# EAGLE board XBee-Explorer-Dongle-Panel-v23 (EAGLE 7.2.0), part 1 of 4
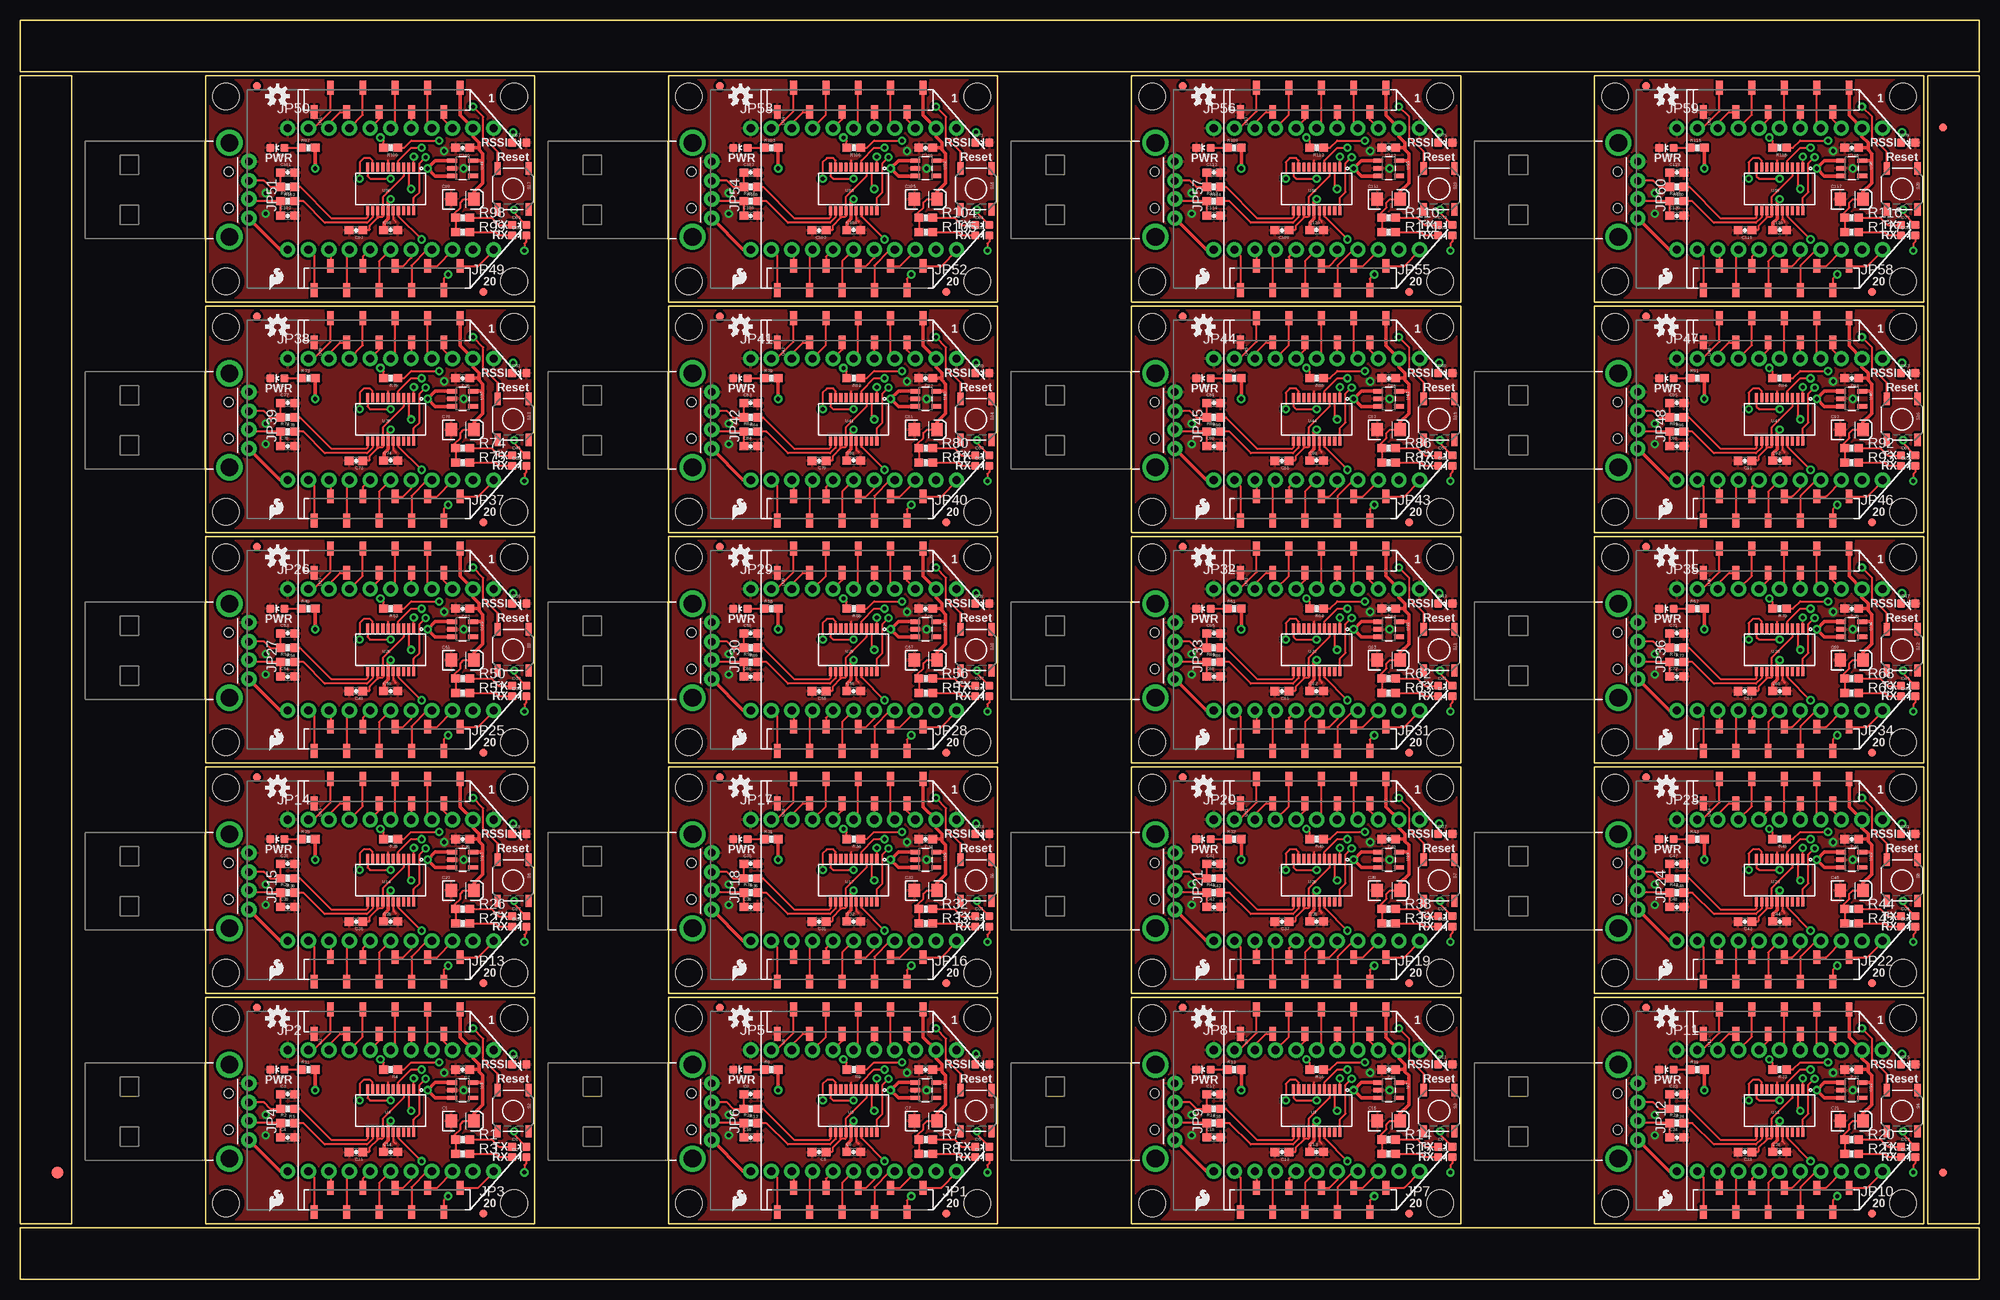
[diagram p0: board, top side]
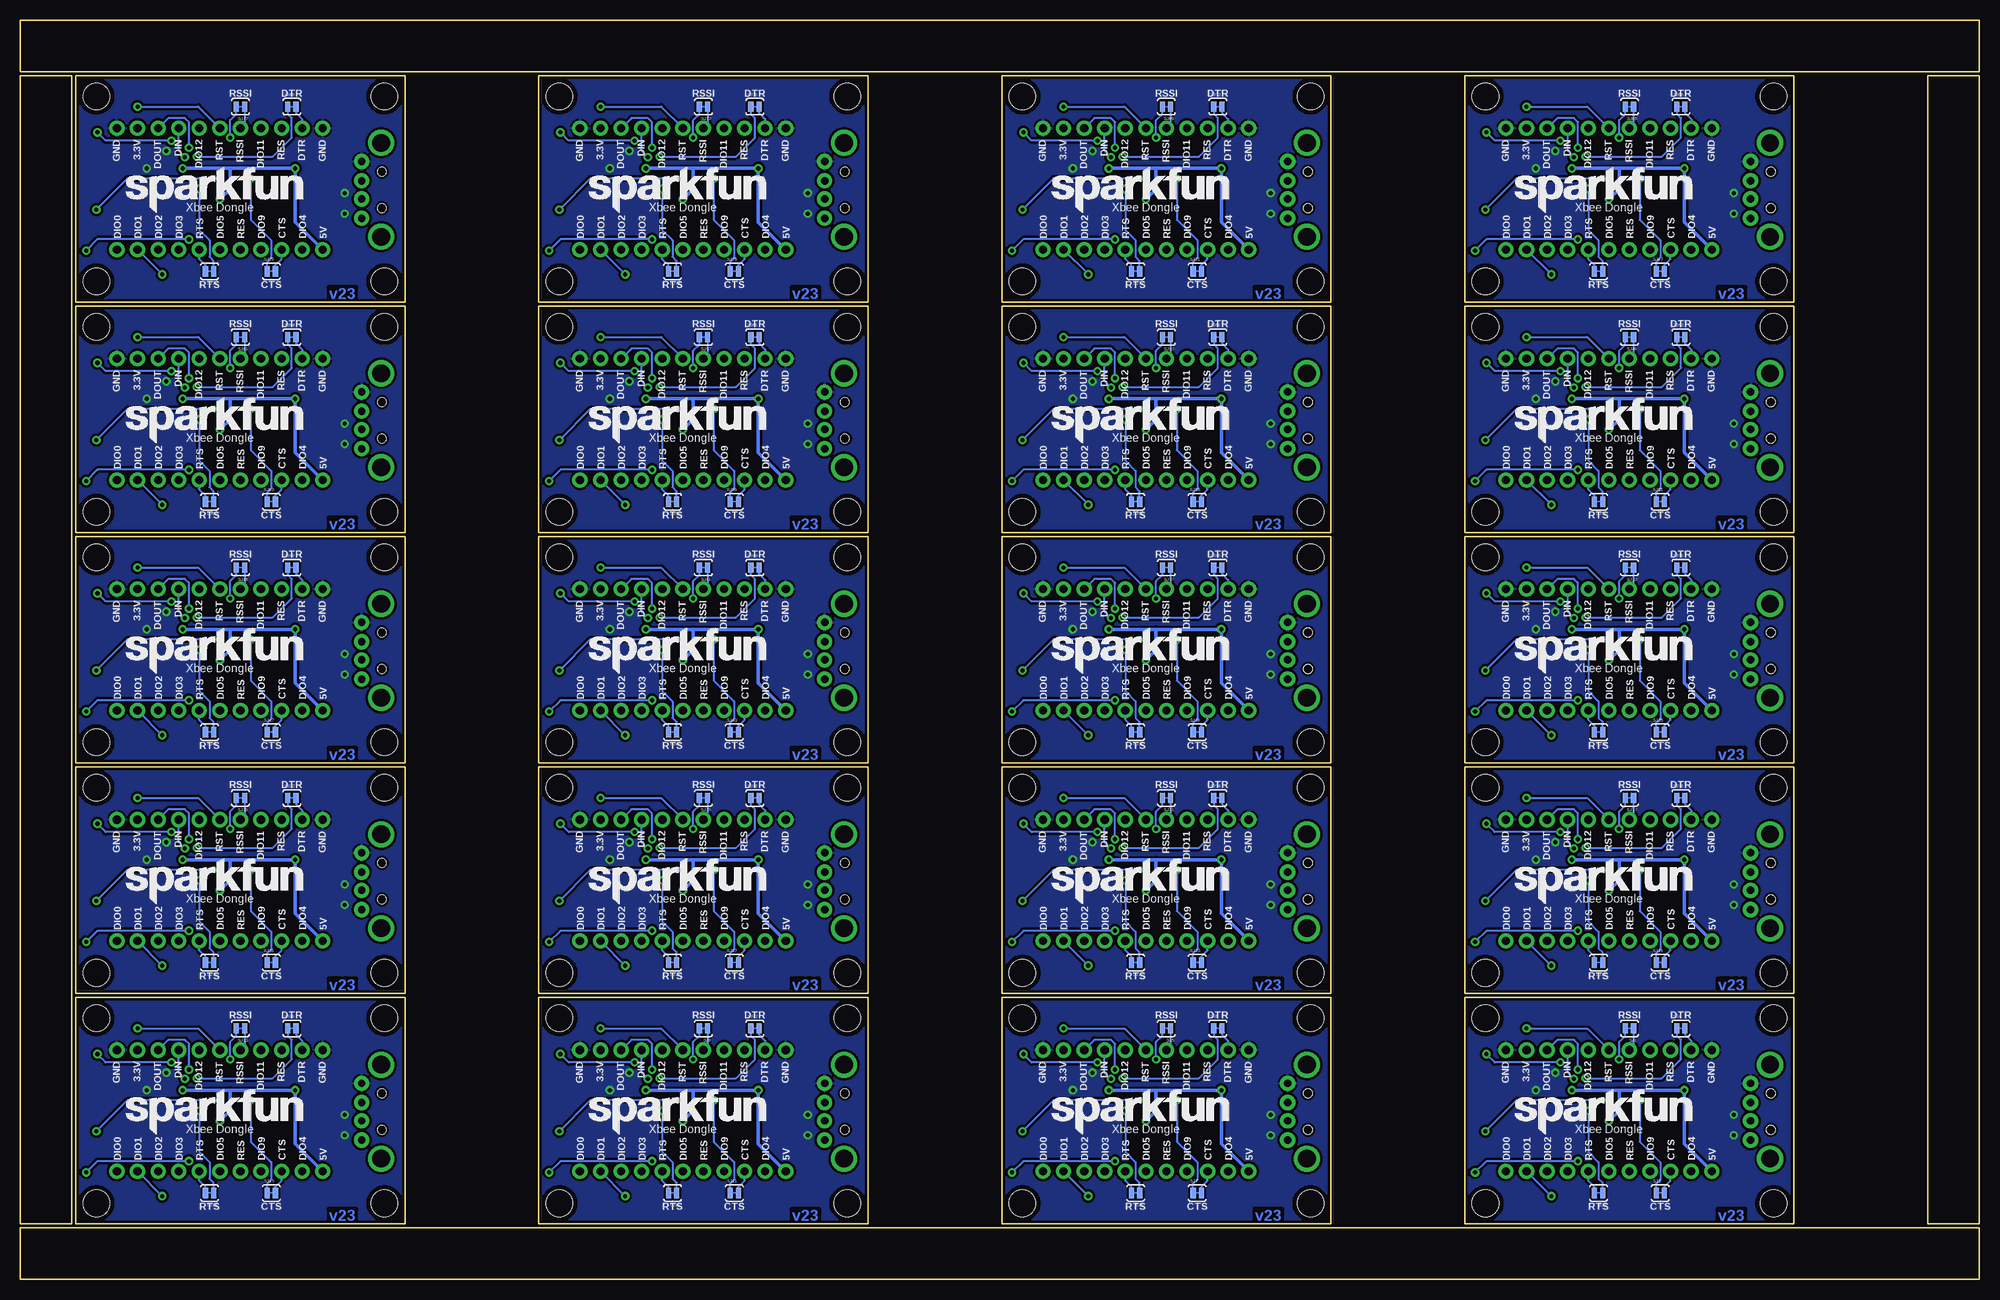
[diagram p1: board, bottom side, seen from below]

Size 241.81 x 155.45 mm. Coordinates in mm from the lower left corner, seen from the top.
Outline: 63.5,6.86 63.5,34.8 22.86,34.8 22.86,6.86 63.5,6.86
Outline: 120.65,6.86 120.65,34.8 80.01,34.8 80.01,6.86 120.65,6.86
Outline: 177.8,6.86 177.8,34.8 137.16,34.8 137.16,6.86 177.8,6.86
Outline: 234.95,6.86 234.95,34.8 194.31,34.8 194.31,6.86 234.95,6.86
Outline: 63.5,35.31 63.5,63.25 22.86,63.25 22.86,35.31 63.5,35.31
Outline: 120.65,35.31 120.65,63.25 80.01,63.25 80.01,35.31 120.65,35.31
Outline: 177.8,35.31 177.8,63.25 137.16,63.25 137.16,35.31 177.8,35.31
Outline: 234.95,35.31 234.95,63.25 194.31,63.25 194.31,35.31 234.95,35.31
Outline: 63.5,63.75 63.5,91.69 22.86,91.69 22.86,63.75 63.5,63.75
Outline: 120.65,63.75 120.65,91.69 80.01,91.69 80.01,63.75 120.65,63.75
Outline: 177.8,63.75 177.8,91.69 137.16,91.69 137.16,63.75 177.8,63.75
Outline: 234.95,63.75 234.95,91.69 194.31,91.69 194.31,63.75 234.95,63.75
Outline: 63.5,92.2 63.5,120.14 22.86,120.14 22.86,92.2 63.5,92.2
Outline: 120.65,92.2 120.65,120.14 80.01,120.14 80.01,92.2 120.65,92.2
Outline: 177.8,92.2 177.8,120.14 137.16,120.14 137.16,92.2 177.8,92.2
Outline: 234.95,92.2 234.95,120.14 194.31,120.14 194.31,92.2 234.95,92.2
Outline: 63.5,120.65 63.5,148.59 22.86,148.59 22.86,120.65 63.5,120.65
Outline: 120.65,120.65 120.65,148.59 80.01,148.59 80.01,120.65 120.65,120.65
Outline: 177.8,120.65 177.8,148.59 137.16,148.59 137.16,120.65 177.8,120.65
Outline: 234.95,120.65 234.95,148.59 194.31,148.59 194.31,120.65 234.95,120.65
Outline: 6.35,6.86 6.35,148.59 0,148.59 0,6.86 6.35,6.86
Outline: 0,149.1 241.81,149.1 241.81,155.45 0,155.45 0,149.1
Outline: 235.46,148.59 235.46,6.86 241.81,6.86 241.81,148.59 235.46,148.59
Outline: 241.81,6.35 0,6.35 0,0 241.81,0 241.81,6.35
Copper layers (1*16): Top 0.035mm / dielectric 1.5mm / Bottom 0.035mm
Design rules "SparkFun-2-layer": minimum track width 7mil, minimum drill 15mil, track to track 8mil, track to pad 8mil, pad to pad 8mil, via to via 8mil, smd to smd 8mil, copper to edge 8mil, drill to drill 8mil, minimum pad ring 12mil, minimum via ring 10mil, stop-mask expansion 4mil, vias tented up to drill 20mil, thermal gap 10mil
Net classes: 0 default: width 0.203 mm; 1 vcc: width 0.254 mm; 2 gnd: width 0.254 mm

## Footprints (pad centres in the part's own frame; a part is rotated, then mirrored left to right if it is on the bottom)
EIA3216 = smd 1.4 x 1.6: A 1.4,0; C -1.4,0
0603-CAP = smd 1.1 x 1: 1 -0.85,0; 2 0.85,0
LED-0603 = smd 1 x 1: A 0,-0.877; C 0,0.877
FIDUCIAL-1.5X3 = smd 1.5 x 1.5: 1 0,0
FIDUCIAL-1X2 = smd 1 x 1: 1 0,0
1X11_NO_SILK = drill 1.016 pad 1.88: 1 0,0; 2 2.54,0; 3 5.08,0; 4 7.62,0; 5 10.16,0; 6 12.7,0; 7 15.24,0; 8 17.78,0; 9 20.32,0; 10 22.86,0; 11 25.4,0
USB-A-H = drill 0.914 pad 1.88: D+ 2.4,1.127; D- 2.4,-1.127; GND 2.4,3.5; VBUS 2.4,-3.5 | drill 2.2: GND2 0,-5.8; GND3 0,5.8 | hole 1.1: -0.1,2.25; -0.1,-2.25
0603-RES = smd 1.1 x 1: 1 -0.85,0; 2 0.85,0
TACTILE_SWITCH_SMD = smd 1.524 x 0.762: 1 -2.54,1.905; 2 2.54,1.905; 3 -2.54,-1.905; 4 2.54,-1.905
SJ_2S-TRACE = smd 0.635 x 1.27: 1 -0.508,0; 2 0.508,0
SOT23-5 = smd 0.55 x 1.2: 1 -0.95,-1.3; 2 0,-1.3; 3 0.95,-1.3; 4 0.95,1.3; 5 -0.95,1.3
XBEE-SMD = smd 1.7 x 0.85: 1 -12.5,20; 2 -9.5,18; 3 -12.5,16; 4 -9.5,14; 5 -12.5,12; 6 -9.5,10; 7 -12.5,8; 8 -9.5,6; 9 -12.5,4; 10 -9.5,2; 11 12.5,2; 12 9.5,4; 13 12.5,6; 14 9.5,8; 15 12.5,10; 16 9.5,12; 17 12.5,14; 18 9.5,16; 19 12.5,18; 20 9.5,20
SSOP20_L = smd 0.381 x 1.143: 1 -2.857,-2.68; 2 -2.223,-2.68; 3 -1.587,-2.68; 4 -0.953,-2.68; 5 -0.318,-2.68; 6 0.318,-2.68; 7 0.953,-2.68; 8 1.587,-2.68; 9 2.223,-2.68; 10 2.857,-2.68; 11 2.857,2.68; 12 2.223,2.68; 13 1.587,2.68; 14 0.953,2.68; 15 0.318,2.68; 16 -0.318,2.68; 17 -0.953,2.68; 18 -1.587,2.68; 19 -2.223,2.68; 20 -2.857,2.68
STAND-OFF = hole 3.302: 0,0

## Placement (x,y rotation side)
C1  10uF  [EIA3216]  54.61,19.56 0 top
C2  0.1uF  [0603-CAP]  54.61,25.91 180 top
C3  47pF  [0603-CAP]  33.02,22.86 0 top
C4  47pF  [0603-CAP]  33.02,17.53 0 top
C5  0.1uF  [0603-CAP]  98.59,15.72 180 top
C6  0.1uF  [0603-CAP]  102.87,15.75 0 top
C7  10uF  [EIA3216]  111.76,19.56 0 top
C8  0.1uF  [0603-CAP]  111.76,25.91 180 top
C9  47pF  [0603-CAP]  90.17,22.86 0 top
C10  47pF  [0603-CAP]  90.17,17.53 0 top
C11  0.1uF  [0603-CAP]  41.44,15.72 180 top
C12  0.1uF  [0603-CAP]  155.74,15.72 180 top
C13  0.1uF  [0603-CAP]  160.02,15.75 0 top
C14  0.1uF  [0603-CAP]  45.72,15.75 0 top
C15  10uF  [EIA3216]  168.91,19.56 0 top
C16  0.1uF  [0603-CAP]  168.91,25.91 180 top
C17  47pF  [0603-CAP]  147.32,22.86 0 top
C18  47pF  [0603-CAP]  147.32,17.53 0 top
C19  0.1uF  [0603-CAP]  212.89,15.72 180 top
C20  0.1uF  [0603-CAP]  217.17,15.75 0 top
C21  10uF  [EIA3216]  226.06,19.56 0 top
C22  0.1uF  [0603-CAP]  226.06,25.91 180 top
C23  47pF  [0603-CAP]  204.47,22.86 0 top
C24  47pF  [0603-CAP]  204.47,17.53 0 top
C25  0.1uF  [0603-CAP]  41.44,44.17 180 top
C26  0.1uF  [0603-CAP]  45.72,44.2 0 top
C27  10uF  [EIA3216]  54.61,48.01 0 top
C28  0.1uF  [0603-CAP]  54.61,54.36 180 top
C29  47pF  [0603-CAP]  33.02,51.31 0 top
C30  47pF  [0603-CAP]  33.02,45.97 0 top
C31  0.1uF  [0603-CAP]  98.59,44.17 180 top
C32  0.1uF  [0603-CAP]  102.87,44.2 0 top
C33  10uF  [EIA3216]  111.76,48.01 0 top
C34  0.1uF  [0603-CAP]  111.76,54.36 180 top
C35  47pF  [0603-CAP]  90.17,51.31 0 top
C36  47pF  [0603-CAP]  90.17,45.97 0 top
C37  0.1uF  [0603-CAP]  155.74,44.17 180 top
C38  0.1uF  [0603-CAP]  160.02,44.2 0 top
C39  10uF  [EIA3216]  168.91,48.01 0 top
C40  0.1uF  [0603-CAP]  168.91,54.36 180 top
C41  47pF  [0603-CAP]  147.32,51.31 0 top
C42  47pF  [0603-CAP]  147.32,45.97 0 top
C43  0.1uF  [0603-CAP]  212.89,44.17 180 top
C44  0.1uF  [0603-CAP]  217.17,44.2 0 top
C45  10uF  [EIA3216]  226.06,48.01 0 top
C46  0.1uF  [0603-CAP]  226.06,54.36 180 top
C47  47pF  [0603-CAP]  204.47,51.31 0 top
C48  47pF  [0603-CAP]  204.47,45.97 0 top
C49  0.1uF  [0603-CAP]  41.44,72.62 180 top
C50  0.1uF  [0603-CAP]  45.72,72.64 0 top
C51  10uF  [EIA3216]  54.61,76.45 0 top
C52  0.1uF  [0603-CAP]  54.61,82.8 180 top
C53  47pF  [0603-CAP]  33.02,79.76 0 top
C54  47pF  [0603-CAP]  33.02,74.42 0 top
C55  0.1uF  [0603-CAP]  98.59,72.62 180 top
C56  0.1uF  [0603-CAP]  102.87,72.64 0 top
C57  10uF  [EIA3216]  111.76,76.45 0 top
C58  0.1uF  [0603-CAP]  111.76,82.8 180 top
C59  47pF  [0603-CAP]  90.17,79.76 0 top
C60  47pF  [0603-CAP]  90.17,74.42 0 top
C61  0.1uF  [0603-CAP]  155.74,72.62 180 top
C62  0.1uF  [0603-CAP]  160.02,72.64 0 top
C63  10uF  [EIA3216]  168.91,76.45 0 top
C64  0.1uF  [0603-CAP]  168.91,82.8 180 top
C65  47pF  [0603-CAP]  147.32,79.76 0 top
C66  47pF  [0603-CAP]  147.32,74.42 0 top
C67  0.1uF  [0603-CAP]  212.89,72.62 180 top
C68  0.1uF  [0603-CAP]  217.17,72.64 0 top
C69  10uF  [EIA3216]  226.06,76.45 0 top
C70  0.1uF  [0603-CAP]  226.06,82.8 180 top
C71  47pF  [0603-CAP]  204.47,79.76 0 top
C72  47pF  [0603-CAP]  204.47,74.42 0 top
C73  0.1uF  [0603-CAP]  41.44,101.06 180 top
C74  0.1uF  [0603-CAP]  45.72,101.09 0 top
C75  10uF  [EIA3216]  54.61,104.9 0 top
C76  0.1uF  [0603-CAP]  54.61,111.25 180 top
C77  47pF  [0603-CAP]  33.02,108.2 0 top
C78  47pF  [0603-CAP]  33.02,102.87 0 top
C79  0.1uF  [0603-CAP]  98.59,101.06 180 top
C80  0.1uF  [0603-CAP]  102.87,101.09 0 top
C81  10uF  [EIA3216]  111.76,104.9 0 top
C82  0.1uF  [0603-CAP]  111.76,111.25 180 top
C83  47pF  [0603-CAP]  90.17,108.2 0 top
C84  47pF  [0603-CAP]  90.17,102.87 0 top
C85  0.1uF  [0603-CAP]  155.74,101.06 180 top
C86  0.1uF  [0603-CAP]  160.02,101.09 0 top
C87  10uF  [EIA3216]  168.91,104.9 0 top
C88  0.1uF  [0603-CAP]  168.91,111.25 180 top
C89  47pF  [0603-CAP]  147.32,108.2 0 top
C90  47pF  [0603-CAP]  147.32,102.87 0 top
C91  0.1uF  [0603-CAP]  212.89,101.06 180 top
C92  0.1uF  [0603-CAP]  217.17,101.09 0 top
C93  10uF  [EIA3216]  226.06,104.9 0 top
C94  0.1uF  [0603-CAP]  226.06,111.25 180 top
C95  47pF  [0603-CAP]  204.47,108.2 0 top
C96  47pF  [0603-CAP]  204.47,102.87 0 top
C97  0.1uF  [0603-CAP]  41.44,129.51 180 top
C98  0.1uF  [0603-CAP]  45.72,129.54 0 top
C99  10uF  [EIA3216]  54.61,133.35 0 top
C100  0.1uF  [0603-CAP]  54.61,139.7 180 top
C101  47pF  [0603-CAP]  33.02,136.65 0 top
C102  47pF  [0603-CAP]  33.02,131.32 0 top
C103  0.1uF  [0603-CAP]  98.59,129.51 180 top
C104  0.1uF  [0603-CAP]  102.87,129.54 0 top
C105  10uF  [EIA3216]  111.76,133.35 0 top
C106  0.1uF  [0603-CAP]  111.76,139.7 180 top
C107  47pF  [0603-CAP]  90.17,136.65 0 top
C108  47pF  [0603-CAP]  90.17,131.32 0 top
C109  0.1uF  [0603-CAP]  155.74,129.51 180 top
C110  0.1uF  [0603-CAP]  160.02,129.54 0 top
C111  10uF  [EIA3216]  168.91,133.35 0 top
C112  0.1uF  [0603-CAP]  168.91,139.7 180 top
C113  47pF  [0603-CAP]  147.32,136.65 0 top
C114  47pF  [0603-CAP]  147.32,131.32 0 top
C115  0.1uF  [0603-CAP]  212.89,129.51 180 top
C116  0.1uF  [0603-CAP]  217.17,129.54 0 top
C117  10uF  [EIA3216]  226.06,133.35 0 top
C118  0.1uF  [0603-CAP]  226.06,139.7 180 top
C119  47pF  [0603-CAP]  204.47,136.65 0 top
C120  47pF  [0603-CAP]  204.47,131.32 0 top
D1  GREEN  [LED-0603]  61.59,16.38 270 top
D2  Yellow  [LED-0603]  61.59,15.11 270 top
D3  GREEN  [LED-0603]  61.59,26.54 270 top
D4  RED  [LED-0603]  31.75,25.91 90 top
D5  GREEN  [LED-0603]  118.75,16.38 270 top
D6  Yellow  [LED-0603]  118.75,15.11 270 top
D7  GREEN  [LED-0603]  118.75,26.54 270 top
D8  RED  [LED-0603]  88.9,25.91 90 top
D9  GREEN  [LED-0603]  175.89,16.38 270 top
D10  Yellow  [LED-0603]  175.89,15.11 270 top
D11  GREEN  [LED-0603]  175.89,26.54 270 top
D12  RED  [LED-0603]  146.05,25.91 90 top
D13  GREEN  [LED-0603]  233.05,16.38 270 top
D14  Yellow  [LED-0603]  233.05,15.11 270 top
D15  GREEN  [LED-0603]  233.05,26.54 270 top
D16  RED  [LED-0603]  203.2,25.91 90 top
D17  GREEN  [LED-0603]  61.59,44.83 270 top
D18  Yellow  [LED-0603]  61.59,43.56 270 top
D19  GREEN  [LED-0603]  61.59,54.99 270 top
D20  RED  [LED-0603]  31.75,54.36 90 top
D21  GREEN  [LED-0603]  118.75,44.83 270 top
D22  Yellow  [LED-0603]  118.75,43.56 270 top
D23  GREEN  [LED-0603]  118.75,54.99 270 top
D24  RED  [LED-0603]  88.9,54.36 90 top
D25  GREEN  [LED-0603]  175.89,44.83 270 top
D26  Yellow  [LED-0603]  175.89,43.56 270 top
D27  GREEN  [LED-0603]  175.89,54.99 270 top
D28  RED  [LED-0603]  146.05,54.36 90 top
D29  GREEN  [LED-0603]  233.05,44.83 270 top
D30  Yellow  [LED-0603]  233.05,43.56 270 top
D31  GREEN  [LED-0603]  233.05,54.99 270 top
D32  RED  [LED-0603]  203.2,54.36 90 top
D33  GREEN  [LED-0603]  61.59,73.28 270 top
D34  Yellow  [LED-0603]  61.59,72.01 270 top
D35  GREEN  [LED-0603]  61.59,83.44 270 top
D36  RED  [LED-0603]  31.75,82.8 90 top
D37  GREEN  [LED-0603]  118.75,73.28 270 top
D38  Yellow  [LED-0603]  118.75,72.01 270 top
D39  GREEN  [LED-0603]  118.75,83.44 270 top
D40  RED  [LED-0603]  88.9,82.8 90 top
D41  GREEN  [LED-0603]  175.89,73.28 270 top
D42  Yellow  [LED-0603]  175.89,72.01 270 top
D43  GREEN  [LED-0603]  175.89,83.44 270 top
D44  RED  [LED-0603]  146.05,82.8 90 top
D45  GREEN  [LED-0603]  233.05,73.28 270 top
D46  Yellow  [LED-0603]  233.05,72.01 270 top
D47  GREEN  [LED-0603]  233.05,83.44 270 top
D48  RED  [LED-0603]  203.2,82.8 90 top
D49  GREEN  [LED-0603]  61.59,101.73 270 top
D50  Yellow  [LED-0603]  61.59,100.46 270 top
D51  GREEN  [LED-0603]  61.59,111.89 270 top
D52  RED  [LED-0603]  31.75,111.25 90 top
D53  GREEN  [LED-0603]  118.75,101.73 270 top
D54  Yellow  [LED-0603]  118.75,100.46 270 top
D55  GREEN  [LED-0603]  118.75,111.89 270 top
D56  RED  [LED-0603]  88.9,111.25 90 top
D57  GREEN  [LED-0603]  175.89,101.73 270 top
D58  Yellow  [LED-0603]  175.89,100.46 270 top
D59  GREEN  [LED-0603]  175.89,111.89 270 top
D60  RED  [LED-0603]  146.05,111.25 90 top
D61  GREEN  [LED-0603]  233.05,101.73 270 top
D62  Yellow  [LED-0603]  233.05,100.46 270 top
D63  GREEN  [LED-0603]  233.05,111.89 270 top
D64  RED  [LED-0603]  203.2,111.25 90 top
D65  GREEN  [LED-0603]  61.59,130.17 270 top
D66  Yellow  [LED-0603]  61.59,128.91 270 top
D67  GREEN  [LED-0603]  61.59,140.34 270 top
D68  RED  [LED-0603]  31.75,139.7 90 top
D69  GREEN  [LED-0603]  118.75,130.17 270 top
D70  Yellow  [LED-0603]  118.75,128.91 270 top
D71  GREEN  [LED-0603]  118.75,140.34 270 top
D72  RED  [LED-0603]  88.9,139.7 90 top
D73  GREEN  [LED-0603]  175.89,130.17 270 top
D74  Yellow  [LED-0603]  175.89,128.91 270 top
D75  GREEN  [LED-0603]  175.89,140.34 270 top
D76  RED  [LED-0603]  146.05,139.7 90 top
D77  GREEN  [LED-0603]  233.05,130.17 270 top
D78  Yellow  [LED-0603]  233.05,128.91 270 top
D79  GREEN  [LED-0603]  233.05,140.34 270 top
D80  RED  [LED-0603]  203.2,139.7 90 top
E$1  [FIDUCIAL-1.5X3]  4.57,13.21 0 top
E$5  [FIDUCIAL-1X2]  237.36,142.24 180 top
E$6  [FIDUCIAL-1X2]  237.36,13.21 0 top
FID1  FIDUCIAL1X2  [FIDUCIAL-1X2]  29.21,33.53 0 top
FID2  FIDUCIAL1X2  [FIDUCIAL-1X2]  57.15,8.13 0 top
FID3  FIDUCIAL1X2  [FIDUCIAL-1X2]  86.36,33.53 0 top
FID4  FIDUCIAL1X2  [FIDUCIAL-1X2]  114.3,8.13 0 top
FID5  FIDUCIAL1X2  [FIDUCIAL-1X2]  143.51,33.53 0 top
FID6  FIDUCIAL1X2  [FIDUCIAL-1X2]  171.45,8.13 0 top
FID7  FIDUCIAL1X2  [FIDUCIAL-1X2]  200.66,33.53 0 top
FID8  FIDUCIAL1X2  [FIDUCIAL-1X2]  228.6,8.13 0 top
FID9  FIDUCIAL1X2  [FIDUCIAL-1X2]  29.21,61.98 0 top
FID10  FIDUCIAL1X2  [FIDUCIAL-1X2]  57.15,36.58 0 top
FID11  FIDUCIAL1X2  [FIDUCIAL-1X2]  86.36,61.98 0 top
FID12  FIDUCIAL1X2  [FIDUCIAL-1X2]  114.3,36.58 0 top
FID13  FIDUCIAL1X2  [FIDUCIAL-1X2]  143.51,61.98 0 top
FID14  FIDUCIAL1X2  [FIDUCIAL-1X2]  171.45,36.58 0 top
FID15  FIDUCIAL1X2  [FIDUCIAL-1X2]  200.66,61.98 0 top
FID16  FIDUCIAL1X2  [FIDUCIAL-1X2]  228.6,36.58 0 top
FID17  FIDUCIAL1X2  [FIDUCIAL-1X2]  29.21,90.42 0 top
FID18  FIDUCIAL1X2  [FIDUCIAL-1X2]  57.15,65.02 0 top
FID19  FIDUCIAL1X2  [FIDUCIAL-1X2]  86.36,90.42 0 top
FID20  FIDUCIAL1X2  [FIDUCIAL-1X2]  114.3,65.02 0 top
FID21  FIDUCIAL1X2  [FIDUCIAL-1X2]  143.51,90.42 0 top
FID22  FIDUCIAL1X2  [FIDUCIAL-1X2]  171.45,65.02 0 top
FID23  FIDUCIAL1X2  [FIDUCIAL-1X2]  200.66,90.42 0 top
FID24  FIDUCIAL1X2  [FIDUCIAL-1X2]  228.6,65.02 0 top
FID25  FIDUCIAL1X2  [FIDUCIAL-1X2]  29.21,118.87 0 top
FID26  FIDUCIAL1X2  [FIDUCIAL-1X2]  57.15,93.47 0 top
FID27  FIDUCIAL1X2  [FIDUCIAL-1X2]  86.36,118.87 0 top
FID28  FIDUCIAL1X2  [FIDUCIAL-1X2]  114.3,93.47 0 top
FID29  FIDUCIAL1X2  [FIDUCIAL-1X2]  143.51,118.87 0 top
FID30  FIDUCIAL1X2  [FIDUCIAL-1X2]  171.45,93.47 0 top
FID31  FIDUCIAL1X2  [FIDUCIAL-1X2]  200.66,118.87 0 top
FID32  FIDUCIAL1X2  [FIDUCIAL-1X2]  228.6,93.47 0 top
FID33  FIDUCIAL1X2  [FIDUCIAL-1X2]  29.21,147.32 0 top
FID34  FIDUCIAL1X2  [FIDUCIAL-1X2]  57.15,121.92 0 top
FID35  FIDUCIAL1X2  [FIDUCIAL-1X2]  86.36,147.32 0 top
FID36  FIDUCIAL1X2  [FIDUCIAL-1X2]  114.3,121.92 0 top
FID37  FIDUCIAL1X2  [FIDUCIAL-1X2]  143.51,147.32 0 top
FID38  FIDUCIAL1X2  [FIDUCIAL-1X2]  171.45,121.92 0 top
FID39  FIDUCIAL1X2  [FIDUCIAL-1X2]  200.66,147.32 0 top
FID40  FIDUCIAL1X2  [FIDUCIAL-1X2]  228.6,121.92 0 top
JP1  M111X11_NO_SILK  [1X11_NO_SILK]  115.57,13.34 180 top
JP2  M111X11_NO_SILK  [1X11_NO_SILK]  33.02,28.32 0 top
JP3  M111X11_NO_SILK  [1X11_NO_SILK]  58.42,13.34 180 top
JP4  USB-A-H  [USB-A-H]  25.82,20.71 0 top
JP5  M111X11_NO_SILK  [1X11_NO_SILK]  90.17,28.32 0 top
JP6  USB-A-H  [USB-A-H]  82.97,20.71 0 top
JP7  M111X11_NO_SILK  [1X11_NO_SILK]  172.72,13.34 180 top
JP8  M111X11_NO_SILK  [1X11_NO_SILK]  147.32,28.32 0 top
JP9  USB-A-H  [USB-A-H]  140.12,20.71 0 top
JP10  M111X11_NO_SILK  [1X11_NO_SILK]  229.87,13.34 180 top
JP11  M111X11_NO_SILK  [1X11_NO_SILK]  204.47,28.32 0 top
JP12  USB-A-H  [USB-A-H]  197.27,20.71 0 top
JP13  M111X11_NO_SILK  [1X11_NO_SILK]  58.42,41.78 180 top
JP14  M111X11_NO_SILK  [1X11_NO_SILK]  33.02,56.77 0 top
JP15  USB-A-H  [USB-A-H]  25.82,49.16 0 top
JP16  M111X11_NO_SILK  [1X11_NO_SILK]  115.57,41.78 180 top
JP17  M111X11_NO_SILK  [1X11_NO_SILK]  90.17,56.77 0 top
JP18  USB-A-H  [USB-A-H]  82.97,49.16 0 top
JP19  M111X11_NO_SILK  [1X11_NO_SILK]  172.72,41.78 180 top
JP20  M111X11_NO_SILK  [1X11_NO_SILK]  147.32,56.77 0 top
JP21  USB-A-H  [USB-A-H]  140.12,49.16 0 top
JP22  M111X11_NO_SILK  [1X11_NO_SILK]  229.87,41.78 180 top
JP23  M111X11_NO_SILK  [1X11_NO_SILK]  204.47,56.77 0 top
JP24  USB-A-H  [USB-A-H]  197.27,49.16 0 top
JP25  M111X11_NO_SILK  [1X11_NO_SILK]  58.42,70.23 180 top
JP26  M111X11_NO_SILK  [1X11_NO_SILK]  33.02,85.22 0 top
JP27  USB-A-H  [USB-A-H]  25.82,77.61 0 top
JP28  M111X11_NO_SILK  [1X11_NO_SILK]  115.57,70.23 180 top
JP29  M111X11_NO_SILK  [1X11_NO_SILK]  90.17,85.22 0 top
JP30  USB-A-H  [USB-A-H]  82.97,77.61 0 top
JP31  M111X11_NO_SILK  [1X11_NO_SILK]  172.72,70.23 180 top
JP32  M111X11_NO_SILK  [1X11_NO_SILK]  147.32,85.22 0 top
JP33  USB-A-H  [USB-A-H]  140.12,77.61 0 top
JP34  M111X11_NO_SILK  [1X11_NO_SILK]  229.87,70.23 180 top
JP35  M111X11_NO_SILK  [1X11_NO_SILK]  204.47,85.22 0 top
JP36  USB-A-H  [USB-A-H]  197.27,77.61 0 top
JP37  M111X11_NO_SILK  [1X11_NO_SILK]  58.42,98.68 180 top
JP38  M111X11_NO_SILK  [1X11_NO_SILK]  33.02,113.67 0 top
JP39  USB-A-H  [USB-A-H]  25.82,106.06 0 top
JP40  M111X11_NO_SILK  [1X11_NO_SILK]  115.57,98.68 180 top
JP41  M111X11_NO_SILK  [1X11_NO_SILK]  90.17,113.67 0 top
JP42  USB-A-H  [USB-A-H]  82.97,106.06 0 top
JP43  M111X11_NO_SILK  [1X11_NO_SILK]  172.72,98.68 180 top
JP44  M111X11_NO_SILK  [1X11_NO_SILK]  147.32,113.67 0 top
JP45  USB-A-H  [USB-A-H]  140.12,106.06 0 top
JP46  M111X11_NO_SILK  [1X11_NO_SILK]  229.87,98.68 180 top
JP47  M111X11_NO_SILK  [1X11_NO_SILK]  204.47,113.67 0 top
JP48  USB-A-H  [USB-A-H]  197.27,106.06 0 top
JP49  M111X11_NO_SILK  [1X11_NO_SILK]  58.42,127.13 180 top
JP50  M111X11_NO_SILK  [1X11_NO_SILK]  33.02,142.11 0 top
JP51  USB-A-H  [USB-A-H]  25.82,134.51 0 top
JP52  M111X11_NO_SILK  [1X11_NO_SILK]  115.57,127.13 180 top
JP53  M111X11_NO_SILK  [1X11_NO_SILK]  90.17,142.11 0 top
JP54  USB-A-H  [USB-A-H]  82.97,134.51 0 top
JP55  M111X11_NO_SILK  [1X11_NO_SILK]  172.72,127.13 180 top
JP56  M111X11_NO_SILK  [1X11_NO_SILK]  147.32,142.11 0 top
JP57  USB-A-H  [USB-A-H]  140.12,134.51 0 top
JP58  M111X11_NO_SILK  [1X11_NO_SILK]  229.87,127.13 180 top
JP59  M111X11_NO_SILK  [1X11_NO_SILK]  204.47,142.11 0 top
JP60  USB-A-H  [USB-A-H]  197.27,134.51 0 top
LOGO1  SFE_LOGO_FLAME.1_INCH  [SFE_LOGO_FLAME_.1]  30.48,8.13 0 top
LOGO2  SFE_LOGO_NAME.2_INCH  [SFE_LOGO_NAME_.2]  57.28,17.91 0 bottom
LOGO3  SFE_LOGO_FLAME.1_INCH  [SFE_LOGO_FLAME_.1]  87.63,8.13 0 top
LOGO4  SFE_LOGO_NAME.2_INCH  [SFE_LOGO_NAME_.2]  114.43,17.91 0 bottom
LOGO5  SFE_LOGO_FLAME.1_INCH  [SFE_LOGO_FLAME_.1]  144.78,8.13 0 top
LOGO6  SFE_LOGO_NAME.2_INCH  [SFE_LOGO_NAME_.2]  171.58,17.91 0 bottom
LOGO7  SFE_LOGO_FLAME.1_INCH  [SFE_LOGO_FLAME_.1]  201.93,8.13 0 top
LOGO8  SFE_LOGO_NAME.2_INCH  [SFE_LOGO_NAME_.2]  228.73,17.91 0 bottom
LOGO9  SFE_LOGO_FLAME.1_INCH  [SFE_LOGO_FLAME_.1]  30.48,36.58 0 top
LOGO10  SFE_LOGO_NAME.2_INCH  [SFE_LOGO_NAME_.2]  57.28,46.35 0 bottom
LOGO11  SFE_LOGO_FLAME.1_INCH  [SFE_LOGO_FLAME_.1]  87.63,36.58 0 top
LOGO12  SFE_LOGO_NAME.2_INCH  [SFE_LOGO_NAME_.2]  114.43,46.35 0 bottom
LOGO13  SFE_LOGO_FLAME.1_INCH  [SFE_LOGO_FLAME_.1]  144.78,36.58 0 top
LOGO14  SFE_LOGO_NAME.2_INCH  [SFE_LOGO_NAME_.2]  171.58,46.35 0 bottom
LOGO15  SFE_LOGO_FLAME.1_INCH  [SFE_LOGO_FLAME_.1]  201.93,36.58 0 top
LOGO16  SFE_LOGO_NAME.2_INCH  [SFE_LOGO_NAME_.2]  228.73,46.35 0 bottom
LOGO17  SFE_LOGO_FLAME.1_INCH  [SFE_LOGO_FLAME_.1]  30.48,65.02 0 top
LOGO18  SFE_LOGO_NAME.2_INCH  [SFE_LOGO_NAME_.2]  57.28,74.8 0 bottom
LOGO19  SFE_LOGO_FLAME.1_INCH  [SFE_LOGO_FLAME_.1]  87.63,65.02 0 top
LOGO20  SFE_LOGO_NAME.2_INCH  [SFE_LOGO_NAME_.2]  114.43,74.8 0 bottom
LOGO21  SFE_LOGO_FLAME.1_INCH  [SFE_LOGO_FLAME_.1]  144.78,65.02 0 top
LOGO22  SFE_LOGO_NAME.2_INCH  [SFE_LOGO_NAME_.2]  171.58,74.8 0 bottom
LOGO23  SFE_LOGO_FLAME.1_INCH  [SFE_LOGO_FLAME_.1]  201.93,65.02 0 top
LOGO24  SFE_LOGO_NAME.2_INCH  [SFE_LOGO_NAME_.2]  228.73,74.8 0 bottom
LOGO25  SFE_LOGO_FLAME.1_INCH  [SFE_LOGO_FLAME_.1]  30.48,93.47 0 top
LOGO26  SFE_LOGO_NAME.2_INCH  [SFE_LOGO_NAME_.2]  57.28,103.25 0 bottom
LOGO27  SFE_LOGO_FLAME.1_INCH  [SFE_LOGO_FLAME_.1]  87.63,93.47 0 top
LOGO28  SFE_LOGO_NAME.2_INCH  [SFE_LOGO_NAME_.2]  114.43,103.25 0 bottom
LOGO29  SFE_LOGO_FLAME.1_INCH  [SFE_LOGO_FLAME_.1]  144.78,93.47 0 top
LOGO30  SFE_LOGO_NAME.2_INCH  [SFE_LOGO_NAME_.2]  171.58,103.25 0 bottom
LOGO31  SFE_LOGO_FLAME.1_INCH  [SFE_LOGO_FLAME_.1]  201.93,93.47 0 top
LOGO32  SFE_LOGO_NAME.2_INCH  [SFE_LOGO_NAME_.2]  228.73,103.25 0 bottom
LOGO33  SFE_LOGO_FLAME.1_INCH  [SFE_LOGO_FLAME_.1]  30.48,121.92 0 top
LOGO34  SFE_LOGO_NAME.2_INCH  [SFE_LOGO_NAME_.2]  57.28,131.7 0 bottom
LOGO35  SFE_LOGO_FLAME.1_INCH  [SFE_LOGO_FLAME_.1]  87.63,121.92 0 top
LOGO36  SFE_LOGO_NAME.2_INCH  [SFE_LOGO_NAME_.2]  114.43,131.7 0 bottom
LOGO37  SFE_LOGO_FLAME.1_INCH  [SFE_LOGO_FLAME_.1]  144.78,121.92 0 top
LOGO38  SFE_LOGO_NAME.2_INCH  [SFE_LOGO_NAME_.2]  171.58,131.7 0 bottom
LOGO39  SFE_LOGO_FLAME.1_INCH  [SFE_LOGO_FLAME_.1]  201.93,121.92 0 top
LOGO40  SFE_LOGO_NAME.2_INCH  [SFE_LOGO_NAME_.2]  228.73,131.7 0 bottom
R1  1K  [0603-RES]  54.61,17.27 0 top
R2  27  [0603-RES]  33.02,19.3 0 top
R3  1K  [0603-RES]  54.61,15.49 0 top
R4  330  [0603-RES]  45.72,25.91 180 top
R5  27  [0603-RES]  33.02,21.08 180 top
R6  1K  [0603-RES]  92.71,25.91 0 top
R7  1K  [0603-RES]  111.76,17.27 0 top
R8  1K  [0603-RES]  111.76,15.49 0 top
R9  330  [0603-RES]  102.87,25.91 180 top
R10  27  [0603-RES]  90.17,19.3 0 top
R11  1K  [0603-RES]  35.56,25.91 0 top
R12  27  [0603-RES]  90.17,21.08 180 top
R13  1K  [0603-RES]  149.86,25.91 0 top
R14  1K  [0603-RES]  168.91,17.27 0 top
R15  1K  [0603-RES]  168.91,15.49 0 top
R16  330  [0603-RES]  160.02,25.91 180 top
R17  27  [0603-RES]  147.32,19.3 0 top
R18  27  [0603-RES]  147.32,21.08 180 top
R19  1K  [0603-RES]  207.01,25.91 0 top
R20  1K  [0603-RES]  226.06,17.27 0 top
R21  1K  [0603-RES]  226.06,15.49 0 top
R22  330  [0603-RES]  217.17,25.91 180 top
R23  27  [0603-RES]  204.47,19.3 0 top
R24  27  [0603-RES]  204.47,21.08 180 top
R25  1K  [0603-RES]  35.56,54.36 0 top
R26  1K  [0603-RES]  54.61,45.72 0 top
R27  1K  [0603-RES]  54.61,43.94 0 top
R28  330  [0603-RES]  45.72,54.36 180 top
R29  27  [0603-RES]  33.02,47.75 0 top
R30  27  [0603-RES]  33.02,49.53 180 top
R31  1K  [0603-RES]  92.71,54.36 0 top
R32  1K  [0603-RES]  111.76,45.72 0 top
R33  1K  [0603-RES]  111.76,43.94 0 top
R34  330  [0603-RES]  102.87,54.36 180 top
R35  27  [0603-RES]  90.17,47.75 0 top
R36  27  [0603-RES]  90.17,49.53 180 top
R37  1K  [0603-RES]  149.86,54.36 0 top
R38  1K  [0603-RES]  168.91,45.72 0 top
R39  1K  [0603-RES]  168.91,43.94 0 top
R40  330  [0603-RES]  160.02,54.36 180 top
R41  27  [0603-RES]  147.32,47.75 0 top
R42  27  [0603-RES]  147.32,49.53 180 top
R43  1K  [0603-RES]  207.01,54.36 0 top
R44  1K  [0603-RES]  226.06,45.72 0 top
R45  1K  [0603-RES]  226.06,43.94 0 top
R46  330  [0603-RES]  217.17,54.36 180 top
R47  27  [0603-RES]  204.47,47.75 0 top
R48  27  [0603-RES]  204.47,49.53 180 top
R49  1K  [0603-RES]  35.56,82.8 0 top
R50  1K  [0603-RES]  54.61,74.17 0 top
R51  1K  [0603-RES]  54.61,72.39 0 top
R52  330  [0603-RES]  45.72,82.8 180 top
R53  27  [0603-RES]  33.02,76.2 0 top
R54  27  [0603-RES]  33.02,77.98 180 top
R55  1K  [0603-RES]  92.71,82.8 0 top
R56  1K  [0603-RES]  111.76,74.17 0 top
R57  1K  [0603-RES]  111.76,72.39 0 top
R58  330  [0603-RES]  102.87,82.8 180 top
R59  27  [0603-RES]  90.17,76.2 0 top
R60  27  [0603-RES]  90.17,77.98 180 top
R61  1K  [0603-RES]  149.86,82.8 0 top
R62  1K  [0603-RES]  168.91,74.17 0 top
R63  1K  [0603-RES]  168.91,72.39 0 top
R64  330  [0603-RES]  160.02,82.8 180 top
R65  27  [0603-RES]  147.32,76.2 0 top
R66  27  [0603-RES]  147.32,77.98 180 top
R67  1K  [0603-RES]  207.01,82.8 0 top
R68  1K  [0603-RES]  226.06,74.17 0 top
R69  1K  [0603-RES]  226.06,72.39 0 top
R70  330  [0603-RES]  217.17,82.8 180 top
R71  27  [0603-RES]  204.47,76.2 0 top
R72  27  [0603-RES]  204.47,77.98 180 top
R73  1K  [0603-RES]  35.56,111.25 0 top
R74  1K  [0603-RES]  54.61,102.62 0 top
R75  1K  [0603-RES]  54.61,100.84 0 top
R76  330  [0603-RES]  45.72,111.25 180 top
R77  27  [0603-RES]  33.02,104.65 0 top
R78  27  [0603-RES]  33.02,106.43 180 top
R79  1K  [0603-RES]  92.71,111.25 0 top
R80  1K  [0603-RES]  111.76,102.62 0 top
R81  1K  [0603-RES]  111.76,100.84 0 top
R82  330  [0603-RES]  102.87,111.25 180 top
R83  27  [0603-RES]  90.17,104.65 0 top
R84  27  [0603-RES]  90.17,106.43 180 top
R85  1K  [0603-RES]  149.86,111.25 0 top
R86  1K  [0603-RES]  168.91,102.62 0 top
R87  1K  [0603-RES]  168.91,100.84 0 top
R88  330  [0603-RES]  160.02,111.25 180 top
R89  27  [0603-RES]  147.32,104.65 0 top
R90  27  [0603-RES]  147.32,106.43 180 top
R91  1K  [0603-RES]  207.01,111.25 0 top
R92  1K  [0603-RES]  226.06,102.62 0 top
R93  1K  [0603-RES]  226.06,100.84 0 top
R94  330  [0603-RES]  217.17,111.25 180 top
R95  27  [0603-RES]  204.47,104.65 0 top
R96  27  [0603-RES]  204.47,106.43 180 top
R97  1K  [0603-RES]  35.56,139.7 0 top
R98  1K  [0603-RES]  54.61,131.06 0 top
R99  1K  [0603-RES]  54.61,129.29 0 top
R100  330  [0603-RES]  45.72,139.7 180 top
R101  27  [0603-RES]  33.02,133.1 0 top
R102  27  [0603-RES]  33.02,134.87 180 top
R103  1K  [0603-RES]  92.71,139.7 0 top
R104  1K  [0603-RES]  111.76,131.06 0 top
R105  1K  [0603-RES]  111.76,129.29 0 top
R106  330  [0603-RES]  102.87,139.7 180 top
R107  27  [0603-RES]  90.17,133.1 0 top
R108  27  [0603-RES]  90.17,134.87 180 top
R109  1K  [0603-RES]  149.86,139.7 0 top
R110  1K  [0603-RES]  168.91,131.06 0 top
R111  1K  [0603-RES]  168.91,129.29 0 top
R112  330  [0603-RES]  160.02,139.7 180 top
R113  27  [0603-RES]  147.32,133.1 0 top
R114  27  [0603-RES]  147.32,134.87 180 top
R115  1K  [0603-RES]  207.01,139.7 0 top
R116  1K  [0603-RES]  226.06,131.06 0 top
R117  1K  [0603-RES]  226.06,129.29 0 top
R118  330  [0603-RES]  217.17,139.7 180 top
R119  27  [0603-RES]  204.47,133.1 0 top
R120  27  [0603-RES]  204.47,134.87 180 top
S1  Reset  [TACTILE_SWITCH_SMD]  117.98,20.83 270 top
S2  Reset  [TACTILE_SWITCH_SMD]  60.83,20.83 270 top
S3  Reset  [TACTILE_SWITCH_SMD]  175.13,20.83 270 top
S4  Reset  [TACTILE_SWITCH_SMD]  232.28,20.83 270 top
S5  Reset  [TACTILE_SWITCH_SMD]  60.83,49.28 270 top
S6  Reset  [TACTILE_SWITCH_SMD]  117.98,49.28 270 top
S7  Reset  [TACTILE_SWITCH_SMD]  175.13,49.28 270 top
S8  Reset  [TACTILE_SWITCH_SMD]  232.28,49.28 270 top
S9  Reset  [TACTILE_SWITCH_SMD]  60.83,77.72 270 top
S10  Reset  [TACTILE_SWITCH_SMD]  117.98,77.72 270 top
S11  Reset  [TACTILE_SWITCH_SMD]  175.13,77.72 270 top
S12  Reset  [TACTILE_SWITCH_SMD]  232.28,77.72 270 top
S13  Reset  [TACTILE_SWITCH_SMD]  60.83,106.17 270 top
S14  Reset  [TACTILE_SWITCH_SMD]  117.98,106.17 270 top
S15  Reset  [TACTILE_SWITCH_SMD]  175.13,106.17 270 top
S16  Reset  [TACTILE_SWITCH_SMD]  232.28,106.17 270 top
S17  Reset  [TACTILE_SWITCH_SMD]  60.83,134.62 270 top
S18  Reset  [TACTILE_SWITCH_SMD]  117.98,134.62 270 top
S19  Reset  [TACTILE_SWITCH_SMD]  175.13,134.62 270 top
S20  Reset  [TACTILE_SWITCH_SMD]  232.28,134.62 270 top
SJ1  RSSI  [SJ_2S-TRACE]  43.18,30.99 180 bottom
SJ2  RSSI  [SJ_2S-TRACE]  46.99,10.67 180 bottom
SJ3  RSSI  [SJ_2S-TRACE]  39.37,10.67 0 bottom
SJ4  RSSI  [SJ_2S-TRACE]  36.83,30.99 0 bottom
SJ5  RSSI  [SJ_2S-TRACE]  100.33,30.99 180 bottom
SJ6  RSSI  [SJ_2S-TRACE]  104.14,10.67 180 bottom
SJ7  RSSI  [SJ_2S-TRACE]  96.52,10.67 0 bottom
SJ8  RSSI  [SJ_2S-TRACE]  93.98,30.99 0 bottom
SJ9  RSSI  [SJ_2S-TRACE]  157.48,30.99 180 bottom
SJ10  RSSI  [SJ_2S-TRACE]  161.29,10.67 180 bottom
SJ11  RSSI  [SJ_2S-TRACE]  153.67,10.67 0 bottom
SJ12  RSSI  [SJ_2S-TRACE]  151.13,30.99 0 bottom
SJ13  RSSI  [SJ_2S-TRACE]  214.63,30.99 180 bottom
SJ14  RSSI  [SJ_2S-TRACE]  218.44,10.67 180 bottom
SJ15  RSSI  [SJ_2S-TRACE]  210.82,10.67 0 bottom
SJ16  RSSI  [SJ_2S-TRACE]  208.28,30.99 0 bottom
SJ17  RSSI  [SJ_2S-TRACE]  43.18,59.44 180 bottom
SJ18  RSSI  [SJ_2S-TRACE]  46.99,39.12 180 bottom
SJ19  RSSI  [SJ_2S-TRACE]  39.37,39.12 0 bottom
SJ20  RSSI  [SJ_2S-TRACE]  36.83,59.44 0 bottom
SJ21  RSSI  [SJ_2S-TRACE]  100.33,59.44 180 bottom
SJ22  RSSI  [SJ_2S-TRACE]  104.14,39.12 180 bottom
SJ23  RSSI  [SJ_2S-TRACE]  96.52,39.12 0 bottom
SJ24  RSSI  [SJ_2S-TRACE]  93.98,59.44 0 bottom
SJ25  RSSI  [SJ_2S-TRACE]  157.48,59.44 180 bottom
SJ26  RSSI  [SJ_2S-TRACE]  161.29,39.12 180 bottom
SJ27  RSSI  [SJ_2S-TRACE]  153.67,39.12 0 bottom
SJ28  RSSI  [SJ_2S-TRACE]  151.13,59.44 0 bottom
SJ29  RSSI  [SJ_2S-TRACE]  214.63,59.44 180 bottom
SJ30  RSSI  [SJ_2S-TRACE]  218.44,39.12 180 bottom
SJ31  RSSI  [SJ_2S-TRACE]  210.82,39.12 0 bottom
SJ32  RSSI  [SJ_2S-TRACE]  208.28,59.44 0 bottom
SJ33  RSSI  [SJ_2S-TRACE]  43.18,87.88 180 bottom
SJ34  RSSI  [SJ_2S-TRACE]  46.99,67.56 180 bottom
SJ35  RSSI  [SJ_2S-TRACE]  39.37,67.56 0 bottom
SJ36  RSSI  [SJ_2S-TRACE]  36.83,87.88 0 bottom
SJ37  RSSI  [SJ_2S-TRACE]  100.33,87.88 180 bottom
SJ38  RSSI  [SJ_2S-TRACE]  104.14,67.56 180 bottom
SJ39  RSSI  [SJ_2S-TRACE]  96.52,67.56 0 bottom
SJ40  RSSI  [SJ_2S-TRACE]  93.98,87.88 0 bottom
SJ41  RSSI  [SJ_2S-TRACE]  157.48,87.88 180 bottom
SJ42  RSSI  [SJ_2S-TRACE]  161.29,67.56 180 bottom
SJ43  RSSI  [SJ_2S-TRACE]  153.67,67.56 0 bottom
SJ44  RSSI  [SJ_2S-TRACE]  151.13,87.88 0 bottom
SJ45  RSSI  [SJ_2S-TRACE]  214.63,87.88 180 bottom
SJ46  RSSI  [SJ_2S-TRACE]  218.44,67.56 180 bottom
SJ47  RSSI  [SJ_2S-TRACE]  210.82,67.56 0 bottom
SJ48  RSSI  [SJ_2S-TRACE]  208.28,87.88 0 bottom
SJ49  RSSI  [SJ_2S-TRACE]  43.18,116.33 180 bottom
SJ50  RSSI  [SJ_2S-TRACE]  46.99,96.01 180 bottom
SJ51  RSSI  [SJ_2S-TRACE]  39.37,96.01 0 bottom
SJ52  RSSI  [SJ_2S-TRACE]  36.83,116.33 0 bottom
SJ53  RSSI  [SJ_2S-TRACE]  100.33,116.33 180 bottom
SJ54  RSSI  [SJ_2S-TRACE]  104.14,96.01 180 bottom
SJ55  RSSI  [SJ_2S-TRACE]  96.52,96.01 0 bottom
SJ56  RSSI  [SJ_2S-TRACE]  93.98,116.33 0 bottom
SJ57  RSSI  [SJ_2S-TRACE]  157.48,116.33 180 bottom
SJ58  RSSI  [SJ_2S-TRACE]  161.29,96.01 180 bottom
SJ59  RSSI  [SJ_2S-TRACE]  153.67,96.01 0 bottom
SJ60  RSSI  [SJ_2S-TRACE]  151.13,116.33 0 bottom
SJ61  RSSI  [SJ_2S-TRACE]  214.63,116.33 180 bottom
SJ62  RSSI  [SJ_2S-TRACE]  218.44,96.01 180 bottom
SJ63  RSSI  [SJ_2S-TRACE]  210.82,96.01 0 bottom
SJ64  RSSI  [SJ_2S-TRACE]  208.28,116.33 0 bottom
SJ65  RSSI  [SJ_2S-TRACE]  43.18,144.78 180 bottom
SJ66  RSSI  [SJ_2S-TRACE]  46.99,124.46 180 bottom
SJ67  RSSI  [SJ_2S-TRACE]  39.37,124.46 0 bottom
SJ68  RSSI  [SJ_2S-TRACE]  36.83,144.78 0 bottom
SJ69  RSSI  [SJ_2S-TRACE]  100.33,144.78 180 bottom
SJ70  RSSI  [SJ_2S-TRACE]  104.14,124.46 180 bottom
SJ71  RSSI  [SJ_2S-TRACE]  96.52,124.46 0 bottom
SJ72  RSSI  [SJ_2S-TRACE]  93.98,144.78 0 bottom
SJ73  RSSI  [SJ_2S-TRACE]  157.48,144.78 180 bottom
SJ74  RSSI  [SJ_2S-TRACE]  161.29,124.46 180 bottom
SJ75  RSSI  [SJ_2S-TRACE]  153.67,124.46 0 bottom
SJ76  RSSI  [SJ_2S-TRACE]  151.13,144.78 0 bottom
SJ77  RSSI  [SJ_2S-TRACE]  214.63,144.78 180 bottom
SJ78  RSSI  [SJ_2S-TRACE]  218.44,124.46 180 bottom
SJ79  RSSI  [SJ_2S-TRACE]  210.82,124.46 0 bottom
SJ80  RSSI  [SJ_2S-TRACE]  208.28,144.78 0 bottom
U1  MIC5219 3.3V  [SOT23-5]  111.76,23.37 270 top
U2  XBEE-1B3  [XBEE-SMD]  34.29,20.83 270 top
U3  MIC5219 3.3V  [SOT23-5]  54.61,23.37 270 top
U4  FTS31XS-U  [SSOP20_L]  45.72,20.83 180 top
U5  FTS31XS-U  [SSOP20_L]  102.87,20.83 180 top
U6  XBEE-1B3  [XBEE-SMD]  91.44,20.83 270 top
U7  MIC5219 3.3V  [SOT23-5]  168.91,23.37 270 top
U8  FTS31XS-U  [SSOP20_L]  160.02,20.83 180 top
U9  XBEE-1B3  [XBEE-SMD]  148.59,20.83 270 top
U10  MIC5219 3.3V  [SOT23-5]  226.06,23.37 270 top
U11  FTS31XS-U  [SSOP20_L]  217.17,20.83 180 top
U12  XBEE-1B3  [XBEE-SMD]  205.74,20.83 270 top
U13  MIC5219 3.3V  [SOT23-5]  54.61,51.82 270 top
U14  FTS31XS-U  [SSOP20_L]  45.72,49.28 180 top
U15  XBEE-1B3  [XBEE-SMD]  34.29,49.28 270 top
U16  MIC5219 3.3V  [SOT23-5]  111.76,51.82 270 top
U17  FTS31XS-U  [SSOP20_L]  102.87,49.28 180 top
U18  XBEE-1B3  [XBEE-SMD]  91.44,49.28 270 top
U19  MIC5219 3.3V  [SOT23-5]  168.91,51.82 270 top
U20  FTS31XS-U  [SSOP20_L]  160.02,49.28 180 top
U21  XBEE-1B3  [XBEE-SMD]  148.59,49.28 270 top
U22  MIC5219 3.3V  [SOT23-5]  226.06,51.82 270 top
U23  FTS31XS-U  [SSOP20_L]  217.17,49.28 180 top
U24  XBEE-1B3  [XBEE-SMD]  205.74,49.28 270 top
U25  MIC5219 3.3V  [SOT23-5]  54.61,80.26 270 top
U26  FTS31XS-U  [SSOP20_L]  45.72,77.72 180 top
U27  XBEE-1B3  [XBEE-SMD]  34.29,77.72 270 top
U28  MIC5219 3.3V  [SOT23-5]  111.76,80.26 270 top
U29  FTS31XS-U  [SSOP20_L]  102.87,77.72 180 top
U30  XBEE-1B3  [XBEE-SMD]  91.44,77.72 270 top
U31  MIC5219 3.3V  [SOT23-5]  168.91,80.26 270 top
U32  FTS31XS-U  [SSOP20_L]  160.02,77.72 180 top
U33  XBEE-1B3  [XBEE-SMD]  148.59,77.72 270 top
U34  MIC5219 3.3V  [SOT23-5]  226.06,80.26 270 top
U35  FTS31XS-U  [SSOP20_L]  217.17,77.72 180 top
U36  XBEE-1B3  [XBEE-SMD]  205.74,77.72 270 top
U37  MIC5219 3.3V  [SOT23-5]  54.61,108.71 270 top
U38  FTS31XS-U  [SSOP20_L]  45.72,106.17 180 top
U39  XBEE-1B3  [XBEE-SMD]  34.29,106.17 270 top
U40  MIC5219 3.3V  [SOT23-5]  111.76,108.71 270 top
U41  FTS31XS-U  [SSOP20_L]  102.87,106.17 180 top
U42  XBEE-1B3  [XBEE-SMD]  91.44,106.17 270 top
U43  MIC5219 3.3V  [SOT23-5]  168.91,108.71 270 top
U44  FTS31XS-U  [SSOP20_L]  160.02,106.17 180 top
U45  XBEE-1B3  [XBEE-SMD]  148.59,106.17 270 top
U46  MIC5219 3.3V  [SOT23-5]  226.06,108.71 270 top
U47  FTS31XS-U  [SSOP20_L]  217.17,106.17 180 top
U48  XBEE-1B3  [XBEE-SMD]  205.74,106.17 270 top
U49  MIC5219 3.3V  [SOT23-5]  54.61,137.16 270 top
U50  FTS31XS-U  [SSOP20_L]  45.72,134.62 180 top
U51  XBEE-1B3  [XBEE-SMD]  34.29,134.62 270 top
U52  MIC5219 3.3V  [SOT23-5]  111.76,137.16 270 top
U53  FTS31XS-U  [SSOP20_L]  102.87,134.62 180 top
U54  XBEE-1B3  [XBEE-SMD]  91.44,134.62 270 top
U55  MIC5219 3.3V  [SOT23-5]  168.91,137.16 270 top
U56  FTS31XS-U  [SSOP20_L]  160.02,134.62 180 top
U57  XBEE-1B3  [XBEE-SMD]  148.59,134.62 270 top
U58  MIC5219 3.3V  [SOT23-5]  226.06,137.16 270 top
U59  FTS31XS-U  [SSOP20_L]  217.17,134.62 180 top
U60  XBEE-1B3  [XBEE-SMD]  205.74,134.62 270 top
U$1  STAND-OFF  [STAND-OFF]  82.55,9.4 0 top
U$2  STAND-OFF  [STAND-OFF]  82.55,32.26 0 top
U$3  STAND-OFF  [STAND-OFF]  118.11,32.26 0 top
U$4  STAND-OFF  [STAND-OFF]  118.11,9.4 0 top
U$5  STAND-OFF  [STAND-OFF]  25.4,9.4 0 top
U$6  OSHW-LOGOS  [OSHW-LOGO-S]  88.9,32.26 0 top
U$7  OSHW-LOGOS  [OSHW-LOGO-S]  31.75,32.26 0 top
U$8  STAND-OFF  [STAND-OFF]  139.7,9.4 0 top
U$9  STAND-OFF  [STAND-OFF]  25.4,32.26 0 top
U$10  STAND-OFF  [STAND-OFF]  60.96,32.26 0 top
U$11  STAND-OFF  [STAND-OFF]  60.96,9.4 0 top
U$12  STAND-OFF  [STAND-OFF]  139.7,32.26 0 top
U$13  STAND-OFF  [STAND-OFF]  175.26,32.26 0 top
U$14  STAND-OFF  [STAND-OFF]  175.26,9.4 0 top
U$15  OSHW-LOGOS  [OSHW-LOGO-S]  146.05,32.26 0 top
U$16  STAND-OFF  [STAND-OFF]  196.85,9.4 0 top
U$17  STAND-OFF  [STAND-OFF]  196.85,32.26 0 top
U$18  STAND-OFF  [STAND-OFF]  232.41,32.26 0 top
U$19  STAND-OFF  [STAND-OFF]  232.41,9.4 0 top
U$20  OSHW-LOGOS  [OSHW-LOGO-S]  203.2,32.26 0 top
U$21  STAND-OFF  [STAND-OFF]  25.4,37.85 0 top
U$22  STAND-OFF  [STAND-OFF]  25.4,60.71 0 top
U$23  STAND-OFF  [STAND-OFF]  60.96,60.71 0 top
U$24  STAND-OFF  [STAND-OFF]  60.96,37.85 0 top
U$25  OSHW-LOGOS  [OSHW-LOGO-S]  31.75,60.71 0 top
U$26  STAND-OFF  [STAND-OFF]  82.55,37.85 0 top
U$27  STAND-OFF  [STAND-OFF]  82.55,60.71 0 top
U$28  STAND-OFF  [STAND-OFF]  118.11,60.71 0 top
U$29  STAND-OFF  [STAND-OFF]  118.11,37.85 0 top
U$30  OSHW-LOGOS  [OSHW-LOGO-S]  88.9,60.71 0 top
U$31  STAND-OFF  [STAND-OFF]  139.7,37.85 0 top
U$32  STAND-OFF  [STAND-OFF]  139.7,60.71 0 top
U$33  STAND-OFF  [STAND-OFF]  175.26,60.71 0 top
U$34  STAND-OFF  [STAND-OFF]  175.26,37.85 0 top
U$35  OSHW-LOGOS  [OSHW-LOGO-S]  146.05,60.71 0 top
U$36  STAND-OFF  [STAND-OFF]  196.85,37.85 0 top
U$37  STAND-OFF  [STAND-OFF]  196.85,60.71 0 top
U$38  STAND-OFF  [STAND-OFF]  232.41,60.71 0 top
U$39  STAND-OFF  [STAND-OFF]  232.41,37.85 0 top
U$40  OSHW-LOGOS  [OSHW-LOGO-S]  203.2,60.71 0 top
U$41  STAND-OFF  [STAND-OFF]  25.4,66.29 0 top
U$42  STAND-OFF  [STAND-OFF]  25.4,89.15 0 top
U$43  STAND-OFF  [STAND-OFF]  60.96,89.15 0 top
U$44  STAND-OFF  [STAND-OFF]  60.96,66.29 0 top
U$45  OSHW-LOGOS  [OSHW-LOGO-S]  31.75,89.15 0 top
U$46  STAND-OFF  [STAND-OFF]  82.55,66.29 0 top
U$47  STAND-OFF  [STAND-OFF]  82.55,89.15 0 top
U$48  STAND-OFF  [STAND-OFF]  118.11,89.15 0 top
U$49  STAND-OFF  [STAND-OFF]  118.11,66.29 0 top
U$50  OSHW-LOGOS  [OSHW-LOGO-S]  88.9,89.15 0 top
U$51  STAND-OFF  [STAND-OFF]  139.7,66.29 0 top
U$52  STAND-OFF  [STAND-OFF]  139.7,89.15 0 top
U$53  STAND-OFF  [STAND-OFF]  175.26,89.15 0 top
U$54  STAND-OFF  [STAND-OFF]  175.26,66.29 0 top
U$55  OSHW-LOGOS  [OSHW-LOGO-S]  146.05,89.15 0 top
U$56  STAND-OFF  [STAND-OFF]  196.85,66.29 0 top
U$57  STAND-OFF  [STAND-OFF]  196.85,89.15 0 top
U$58  STAND-OFF  [STAND-OFF]  232.41,89.15 0 top
U$59  STAND-OFF  [STAND-OFF]  232.41,66.29 0 top
U$60  OSHW-LOGOS  [OSHW-LOGO-S]  203.2,89.15 0 top
U$61  STAND-OFF  [STAND-OFF]  25.4,94.74 0 top
U$62  STAND-OFF  [STAND-OFF]  25.4,117.6 0 top
U$63  STAND-OFF  [STAND-OFF]  60.96,117.6 0 top
U$64  STAND-OFF  [STAND-OFF]  60.96,94.74 0 top
U$65  OSHW-LOGOS  [OSHW-LOGO-S]  31.75,117.6 0 top
U$66  STAND-OFF  [STAND-OFF]  82.55,94.74 0 top
U$67  STAND-OFF  [STAND-OFF]  82.55,117.6 0 top
U$68  STAND-OFF  [STAND-OFF]  118.11,117.6 0 top
U$69  STAND-OFF  [STAND-OFF]  118.11,94.74 0 top
U$70  OSHW-LOGOS  [OSHW-LOGO-S]  88.9,117.6 0 top
U$71  STAND-OFF  [STAND-OFF]  139.7,94.74 0 top
U$72  STAND-OFF  [STAND-OFF]  139.7,117.6 0 top
U$73  STAND-OFF  [STAND-OFF]  175.26,117.6 0 top
U$74  STAND-OFF  [STAND-OFF]  175.26,94.74 0 top
U$75  OSHW-LOGOS  [OSHW-LOGO-S]  146.05,117.6 0 top
U$76  STAND-OFF  [STAND-OFF]  196.85,94.74 0 top
U$77  STAND-OFF  [STAND-OFF]  196.85,117.6 0 top
U$78  STAND-OFF  [STAND-OFF]  232.41,117.6 0 top
U$79  STAND-OFF  [STAND-OFF]  232.41,94.74 0 top
U$80  OSHW-LOGOS  [OSHW-LOGO-S]  203.2,117.6 0 top
U$81  STAND-OFF  [STAND-OFF]  25.4,123.19 0 top
U$82  STAND-OFF  [STAND-OFF]  25.4,146.05 0 top
U$83  STAND-OFF  [STAND-OFF]  60.96,146.05 0 top
U$84  STAND-OFF  [STAND-OFF]  60.96,123.19 0 top
U$85  OSHW-LOGOS  [OSHW-LOGO-S]  31.75,146.05 0 top
U$86  STAND-OFF  [STAND-OFF]  82.55,123.19 0 top
U$87  STAND-OFF  [STAND-OFF]  82.55,146.05 0 top
U$88  STAND-OFF  [STAND-OFF]  118.11,146.05 0 top
U$89  STAND-OFF  [STAND-OFF]  118.11,123.19 0 top
U$90  OSHW-LOGOS  [OSHW-LOGO-S]  88.9,146.05 0 top
U$91  STAND-OFF  [STAND-OFF]  139.7,123.19 0 top
U$92  STAND-OFF  [STAND-OFF]  139.7,146.05 0 top
U$93  STAND-OFF  [STAND-OFF]  175.26,146.05 0 top
U$94  STAND-OFF  [STAND-OFF]  175.26,123.19 0 top
U$95  OSHW-LOGOS  [OSHW-LOGO-S]  146.05,146.05 0 top
U$96  STAND-OFF  [STAND-OFF]  196.85,123.19 0 top
U$97  STAND-OFF  [STAND-OFF]  196.85,146.05 0 top
U$98  STAND-OFF  [STAND-OFF]  232.41,146.05 0 top
U$99  STAND-OFF  [STAND-OFF]  232.41,123.19 0 top
U$100  OSHW-LOGOS  [OSHW-LOGO-S]  203.2,146.05 0 top

## Library data of the parts
C1 C7 C15 C21 C27 C33 C39 C45 C51 C57 C63 C69 C75 C81 C87 C93 C99 C105 C111 C117 = SparkFun-Capacitors; PROD_ID: CAP-00811
C2 C5 C6 C8 C11-C14 C16 C19 C20 C22 C25 C26 C28 C31 C32 C34 C37 C38 C40 C43 C44 C46 C49 C50 C52 C55 C56 C58 C61 C62 C64 C67 C68 C70 C73 C74 C76 C79 C80 C82 C85 C86 C88 C91 C92 C94 C97 C98 C100 C103 C104 C106 C109 C110 C112 C115 C116 C118 = SparkFun-Capacitors; PROD_ID: CAP-00810
C3 C4 C9 C10 C17 C18 C23 C24 C29 C30 C35 C36 C41 C42 C47 C48 C53 C54 C59 C60 C65 C66 C71 C72 C77 C78 C83 C84 C89 C90 C95 C96 C101 C102 C107 C108 C113 C114 C119 C120 = SparkFun-Capacitors; PROD_ID: CAP-08913
D1 D3 D5 D7 D9 D11 D13 D15 D17 D19 D21 D23 D25 D27 D29 D31 D33 D35 D37 D39 D41 D43 D45 D47 D49 D51 D53 D55 D57 D59 D61 D63 D65 D67 D69 D71 D73 D75 D77 D79 = SparkFun-LED; PROD_ID: DIO-00821
D2 D6 D10 D14 D18 D22 D26 D30 D34 D38 D42 D46 D50 D54 D58 D62 D66 D70 D74 D78 = SparkFun-LED; PROD_ID: DIO-09003
D4 D8 D12 D16 D20 D24 D28 D32 D36 D40 D44 D48 D52 D56 D60 D64 D68 D72 D76 D80 = SparkFun-LED; PROD_ID: DIO-00819
E$1 = SparkFun-Retired
E$5 E$6 FID1-FID40 LOGO1-LOGO40 = SparkFun-Aesthetics
JP1-JP3 JP5 JP7 JP8 JP10 JP11 JP13 JP14 JP16 JP17 JP19 JP20 JP22 JP23 JP25 JP26 JP28 JP29 JP31 JP32 JP34 JP35 JP37 JP38 JP40 JP41 JP43 JP44 JP46 JP47 JP49 JP50 JP52 JP53 JP55 JP56 JP58 JP59 U$1-U$100 = SparkFun
JP4 JP6 JP9 JP12 JP15 JP18 JP21 JP24 JP27 JP30 JP33 JP36 JP39 JP42 JP45 JP48 JP51 JP54 JP57 JP60 = SparkFun-Connectors; PROD_ID: CONN-08367
R1 R3 R6-R8 R11 R13-R15 R19-R21 R25-R27 R31-R33 R37-R39 R43-R45 R49-R51 R55-R57 R61-R63 R67-R69 R73-R75 R79-R81 R85-R87 R91-R93 R97-R99 R103-R105 R109-R111 R115-R117 = SparkFun-Resistors; PROD_ID: RES-07856
R2 R5 R10 R12 R17 R18 R23 R24 R29 R30 R35 R36 R41 R42 R47 R48 R53 R54 R59 R60 R65 R66 R71 R72 R77 R78 R83 R84 R89 R90 R95 R96 R101 R102 R107 R108 R113 R114 R119 R120 = SparkFun-Resistors; PROD_ID: RES-09334
R4 R9 R16 R22 R28 R34 R40 R46 R52 R58 R64 R70 R76 R82 R88 R94 R100 R106 R112 R118 = SparkFun-Resistors; PROD_ID: RES-00818
S1-S20 = SparkFun-Electromechanical; PROD_ID: SWCH-08247
SJ1-SJ80 = SparkFun-Passives
U1 U3 U7 U10 U13 U16 U19 U22 U25 U28 U31 U34 U37 U40 U43 U46 U49 U52 U55 U58 = SparkFun-PowerIC; PROD_ID: VREG-09872
U2 U6 U9 U12 U15 U18 U21 U24 U27 U30 U33 U36 U39 U42 U45 U48 U51 U54 U57 U60 = SparkFun-RF; PROD_ID: CONN-09042
U4 U5 U8 U11 U14 U17 U20 U23 U26 U29 U32 U35 U38 U41 U44 U47 U50 U53 U56 U59 = SparkFun-DigitalIC; PROD_ID: IC-11524